# EAGLE board lcd (EAGLE 7.7.0)
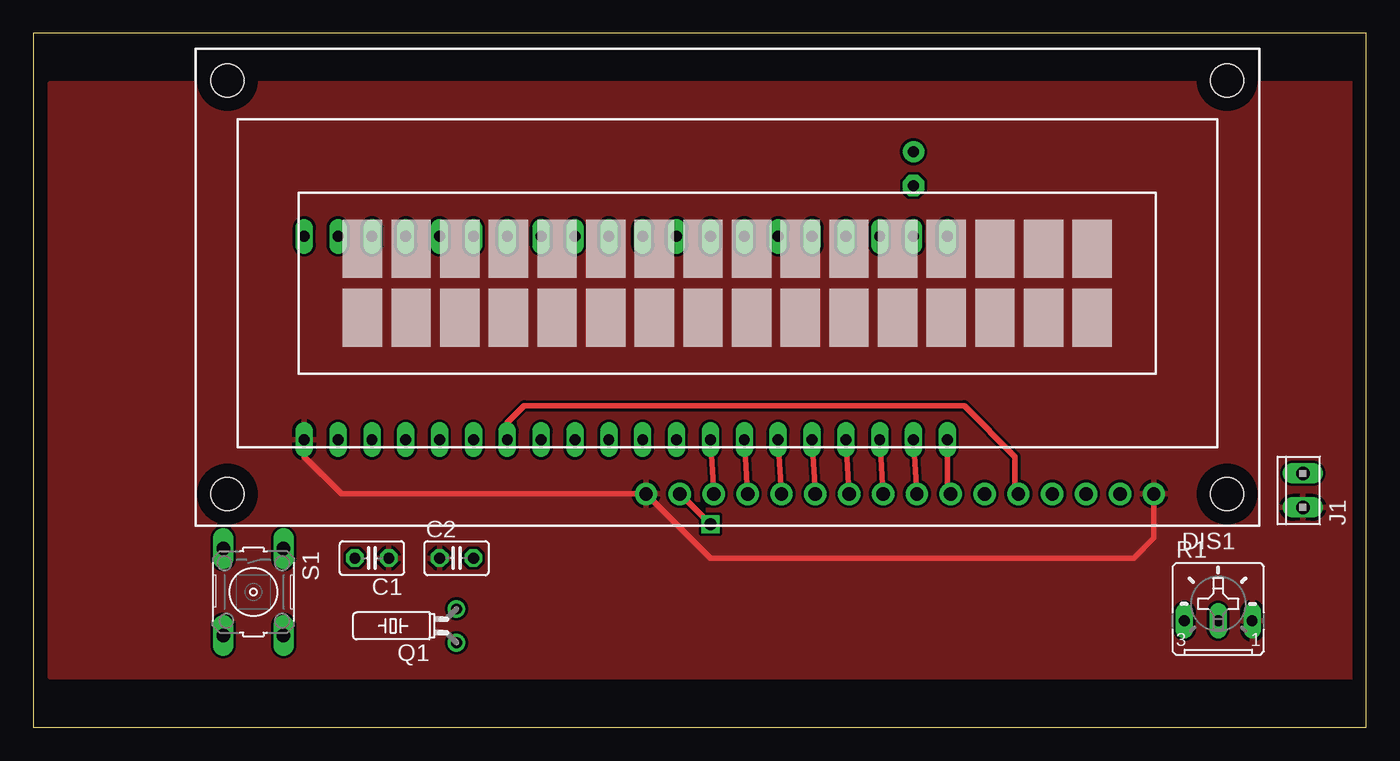
[diagram p0: board, top side]
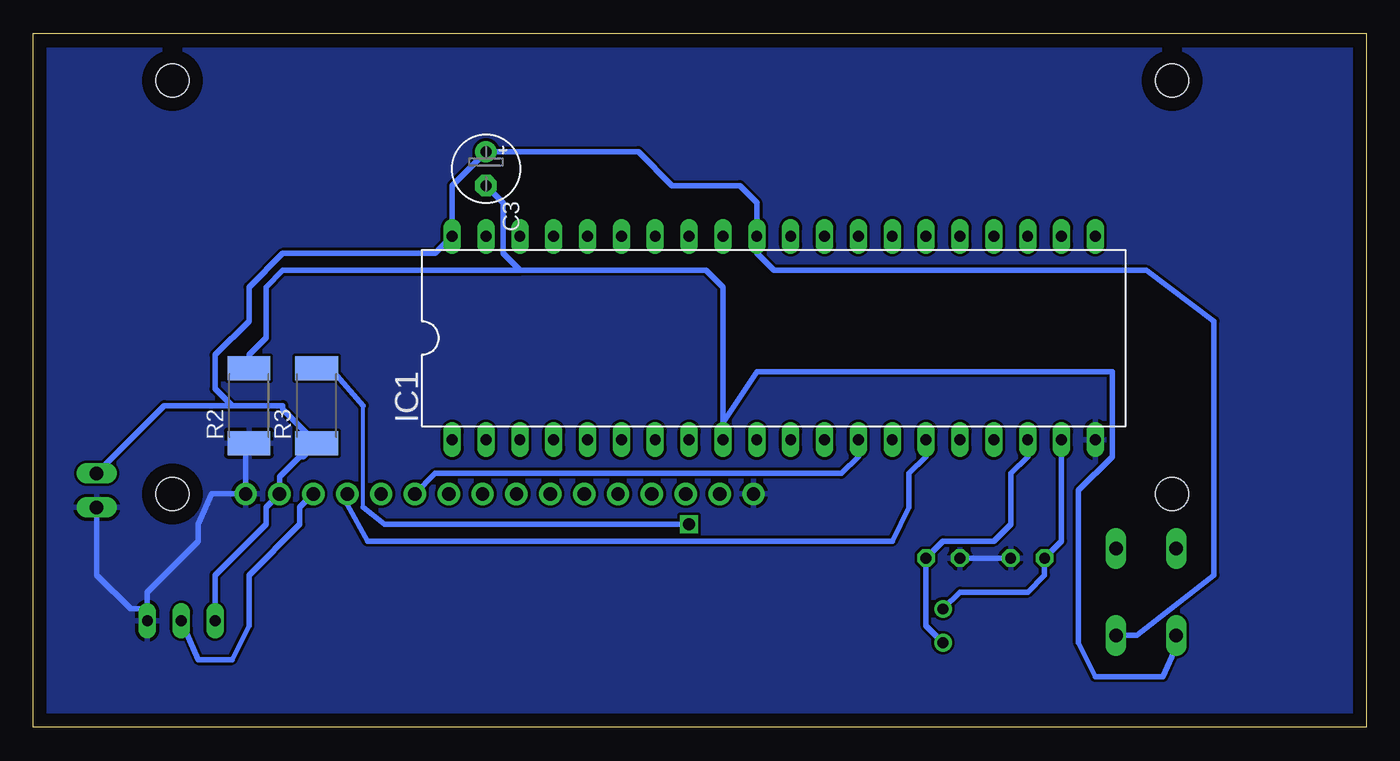
[diagram p1: board, bottom side, seen from below]

Size 100 x 52.06 mm. Coordinates in mm from the lower left corner, seen from the top.
Outline: 0,0 100,0 100,52.06 0,52.06 0,0
Copper layers (1*16): Top 0.035mm / dielectric 1.5mm / Bottom 0.035mm
Design rules "default": minimum track width 10mil, minimum drill 24mil, track to track 8mil, track to pad 8mil, pad to pad 8mil, via to via 8mil, smd to smd 8mil, copper to edge 40mil, drill to drill 8mil, minimum pad ring 10mil, minimum via ring 8mil, stop-mask expansion 4mil, vias tented up to drill 0mil, thermal gap 10mil

## Footprints (pad centres in the part's own frame; a part is rotated, then mirrored left to right if it is on the bottom)
C025-025X050 = drill 0.813 octagon: 1 -1.27,0; 2 1.27,0
E2,5-5 = drill 0.813 pad 1.6: + -1.27,0 | drill 0.813 pad 1.6 octagon: - 1.27,0
TUXGR_16X2_R2 = drill 1 pad 1.676: 1 -32,15.5; 2 -29.46,15.5; 3 -26.92,15.5; 4 -24.38,15.5; 5 -21.84,15.5; 6 -19.3,15.5; 7 -16.76,15.5; 8 -14.22,15.5; 9 -11.68,15.5; 10 -9.14,15.5; 11 -6.6,15.5; 12 -4.06,15.5; 13 -1.52,15.5; 14 1.02,15.5; 15 3.56,15.5; 16 6.1,15.5 | hole 2.5: -37.5,-15.5; 37.5,-15.5; -37.5,15.5; 37.5,15.5
DIL40 = drill 0.813 long: 1 -24.13,-7.62; 2 -21.59,-7.62; 3 -19.05,-7.62; 4 -16.51,-7.62; 5 -13.97,-7.62; 6 -11.43,-7.62; 7 -8.89,-7.62; 8 -6.35,-7.62; 9 -3.81,-7.62; 10 -1.27,-7.62; 11 1.27,-7.62; 12 3.81,-7.62; 13 6.35,-7.62; 14 8.89,-7.62; 15 11.43,-7.62; 16 13.97,-7.62; 17 16.51,-7.62; 18 19.05,-7.62; 19 21.59,-7.62; 20 24.13,-7.62; 21 24.13,7.62; 22 21.59,7.62; 23 19.05,7.62; 24 16.51,7.62; 25 13.97,7.62; 26 11.43,7.62; 27 8.89,7.62; 28 6.35,7.62; 29 3.81,7.62; 30 1.27,7.62; 31 -1.27,7.62; 32 -3.81,7.62; 33 -6.35,7.62; 34 -8.89,7.62; 35 -11.43,7.62; 36 -13.97,7.62; 37 -16.51,7.62; 38 -19.05,7.62; 39 -21.59,7.62; 40 -24.13,7.62
10X02MTA = drill 1.016 long: 1 1.27,0; 2 -1.27,0
TC26H = drill 0.813: 1 -1.27,0; 2 1.27,0
B25U = drill 0.813 long: A 2.54,-0.889; E -2.54,-0.889; S 0,-0.889
R2512 = smd 1.8 x 3.2: 1 -2.8,0; 2 2.8,0
B3F-10XX = drill 1.016 long: 1 -3.251,2.261; 2 3.251,2.261; 3 -3.251,-2.261; 4 3.251,-2.261

## Placement (x,y rotation side)
C1  33pF  [C025-025X050]  25.4,12.7 180 top
C2  33pf  [C025-025X050]  31.75,12.7 0 top
C3  10uF  [E2,5-5]  66.04,41.91 270 bottom
DIS1  TUXGR_16X2_R2  [TUXGR_16X2_R2]  52.07,33.02 180 top
IC1  AT89C51-12PC  [DIL40]  44.45,29.21 0 bottom
J1  [10X02MTA]  95.25,17.78 90 top
Q1  11.0592MHz  [TC26H]  31.75,7.62 90 top
R1  10k  [B25U]  88.9,8.89 0 top
R2  8.2k  [R2512]  83.82,24.13 90 bottom
R3  500E  [R2512]  78.74,24.13 90 bottom
S1  RESET  [B3F-10XX]  16.51,10.16 270 top

## Library data of the parts
C1-C3 R2 R3 = rcl
DIS1 = display-lcd; OC_FARNELL: unknown; OC_NEWARK: unknown
IC1 = atmel; OC_FARNELL: unknown; OC_NEWARK: unknown
J1 = con-amp
Q1 = crystal; OC_FARNELL: unknown; OC_NEWARK: unknown
R1 = pot
S1 = switch-omron; MPN: B3F-1000; OC_FARNELL: 176432; OC_NEWARK: 36M3542

## Nets
GND: C1.1 C2.1 DIS1.1 DIS1.16 IC1.20 J1.2 R1.A R2.1
N$1: DIS1.4 IC1.15
N$2: DIS1.5 IC1.14
N$3: DIS1.3 R1.S
N$4: DIS1.7 IC1.1
N$5: DIS1.8 IC1.2
N$6: DIS1.9 IC1.3
N$7: DIS1.10 IC1.4
N$8: DIS1.11 IC1.5
N$9: DIS1.12 IC1.6
N$10: DIS1.13 IC1.7
N$11: DIS1.14 IC1.8
N$12: C1.2 IC1.19 Q1.2
N$13: C2.2 IC1.18 Q1.1
N$15: DIS1.6 IC1.13
N$16: DIS1.15 R3.2
N$17: C3.- IC1.9 R2.2 S1.4
VCC: C3.+ DIS1.2 IC1.31 IC1.40 J1.1 R1.E R3.1 S1.2

## Tracks (layer width: path | path; a pad name or v marks a point on that pad's centre or on a via)
GND
  Top 0.406: IC1.20 20.32,20.32 23.12,17.52 DIS1.16 46.98,16.51 46.99,16.51 50.8,12.7 82.55,12.7 84.07,14.22 DIS1.1
  Bottom 0.406: 91.44,8.89 91.44,10.16 87.63,13.97 87.63,15.24 86.62,17.52 DIS1.1 84.07,21.08 R2.1 | 91.44,8.89 R1.A 91.44,7.62 | J1.2 95.25,11.43 92.71,8.89 91.44,8.89 | C1.1 C2.1
  pour Bottom: 100.33,50.8 100.33,1.27 0,1.27 0,50.8
  pour Top: 1.27,48.26 99.06,48.26 99.06,3.81 2.54,3.81 1.27,3.81
N$1
  Bottom 0.406: IC1.15 33.02,20.32 34.29,19.05 34.29,16.51 35.56,13.97 74.93,13.97 76.45,16.76 DIS1.4
N$2
  Top 0.406: IC1.14 35.56,22.86 36.83,24.13 69.85,24.13 73.66,20.32 73.66,17.77 DIS1.5
N$3
  Bottom 0.406: R1.S 87.63,5.08 85.09,5.08 83.82,7.62 83.82,11.43 80.01,15.24 80.01,16.51 DIS1.3
N$4
  Top 0.406: IC1.1 68.58,17.77 DIS1.7
N$5
  Top 0.406: IC1.2 DIS1.8
N$6
  Top 0.406: IC1.3 DIS1.9
N$7
  Top 0.406: IC1.4 DIS1.10
N$8
  Top 0.406: IC1.5 DIS1.11
N$9
  Top 0.406: IC1.6 DIS1.12
N$10
  Top 0.406: IC1.7 DIS1.13
N$11
  Top 0.406: IC1.8 DIS1.14
N$12
  Bottom 0.406: Q1.2 30.48,10.16 25.4,10.16 24.13,11.43 C1.2 22.86,13.97 IC1.19
N$13
  Bottom 0.406: Q1.1 33.02,7.62 C2.2 31.75,13.97 27.94,13.97 26.67,15.24 26.67,19.05 25.4,20.32 IC1.18
N$15
  Bottom 0.406: IC1.13 38.1,20.32 39.37,19.05 69.85,19.05 DIS1.6
N$16  (via drill 0.9)
  Top 0.406: DIS1.15 v50.8,15.24
  Bottom 0.305: 75.25,16.51 75.25,24.13
  Bottom 0.406: v50.8,15.24 73.66,15.24 75.25,16.51 | 75.25,24.13 77.47,26.67 78.48,26.67 R3.2
N$17
  Bottom 0.406: S1.4 14.25,6.07 15.24,3.81 20.32,3.81 21.59,6.35 21.59,17.78 19.05,20.32 19.05,26.67 45.72,26.67 48.26,22.86 | IC1.9 48.26,22.86 | 48.26,22.86 48.26,33.02 49.53,34.29 63.5,34.29 | 63.5,34.29 64.77,35.56 64.77,39.37 C3.- | R2.2 83.82,27.94 82.55,29.21 82.55,33.02 81.28,34.29 63.5,34.29
VCC
  Bottom 0.406: R1.E 86.36,11.43 82.55,15.24 82.55,16.51 DIS1.2 81.53,18.8 80.01,20.32 79.75,20.32 R3.1 81.28,23.87 81.28,24.13 85.09,24.13 | S1.2 17.22,6.91 11.43,11.43 11.43,30.48 16.51,34.29 44.45,34.29 45.72,35.56 IC1.31 45.72,39.37 46.99,40.64 52.07,40.64 54.61,43.18 C3.+ 68.58,40.64 IC1.40 69.85,35.56 81.28,35.56 83.82,33.02 83.82,30.48 86.36,27.94 86.36,25.4 85.09,24.13 | J1.1 90.17,24.13 85.09,24.13